# EAGLE board placa 1 (EAGLE 9.3.0)
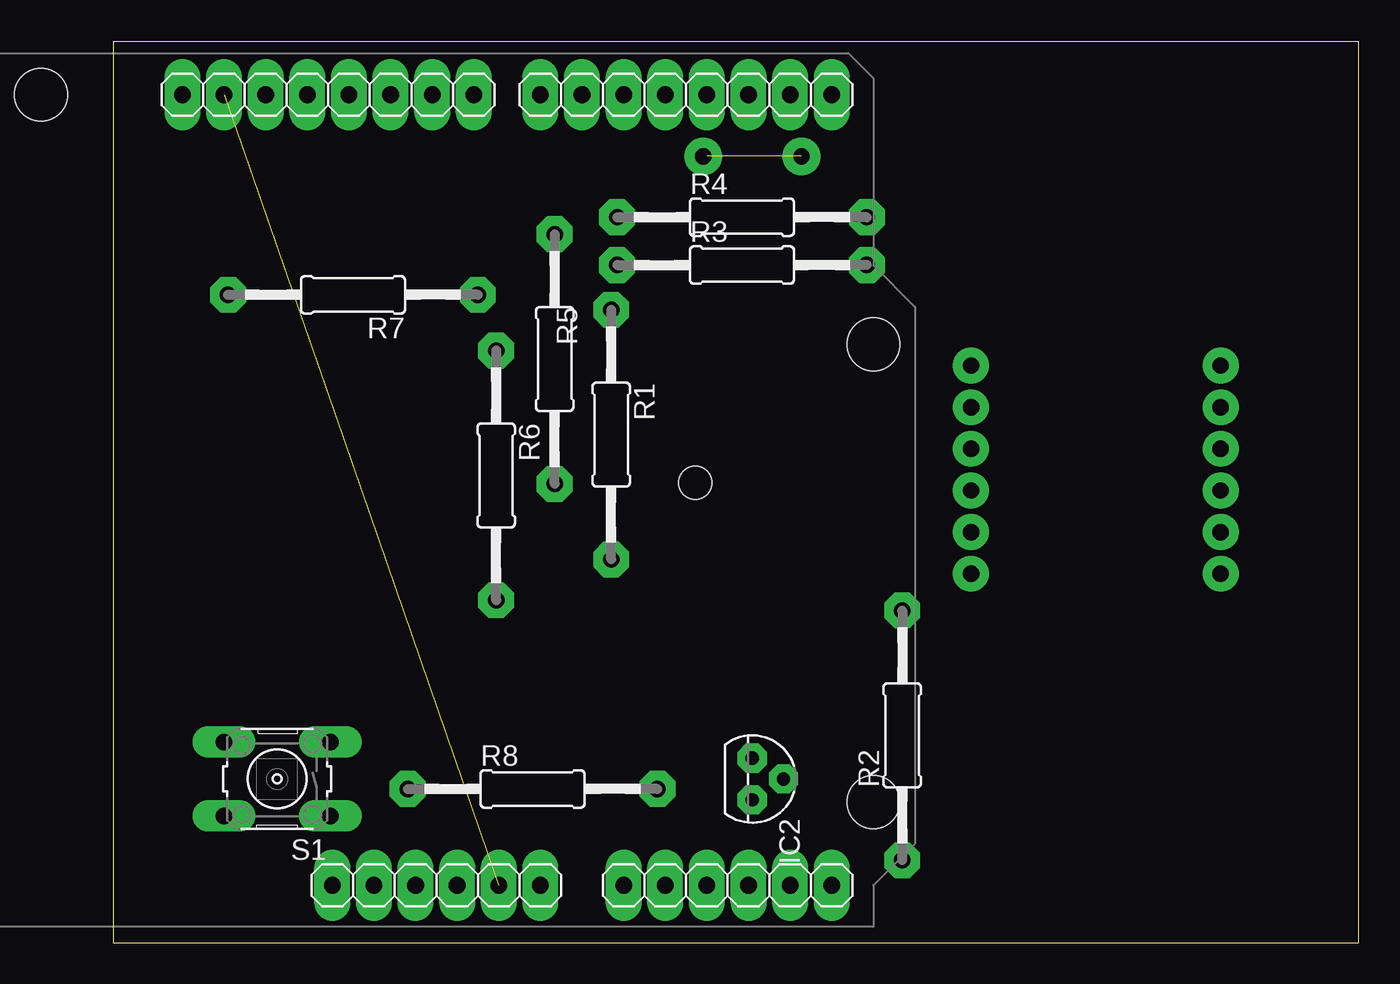
[diagram p0: board, top side]
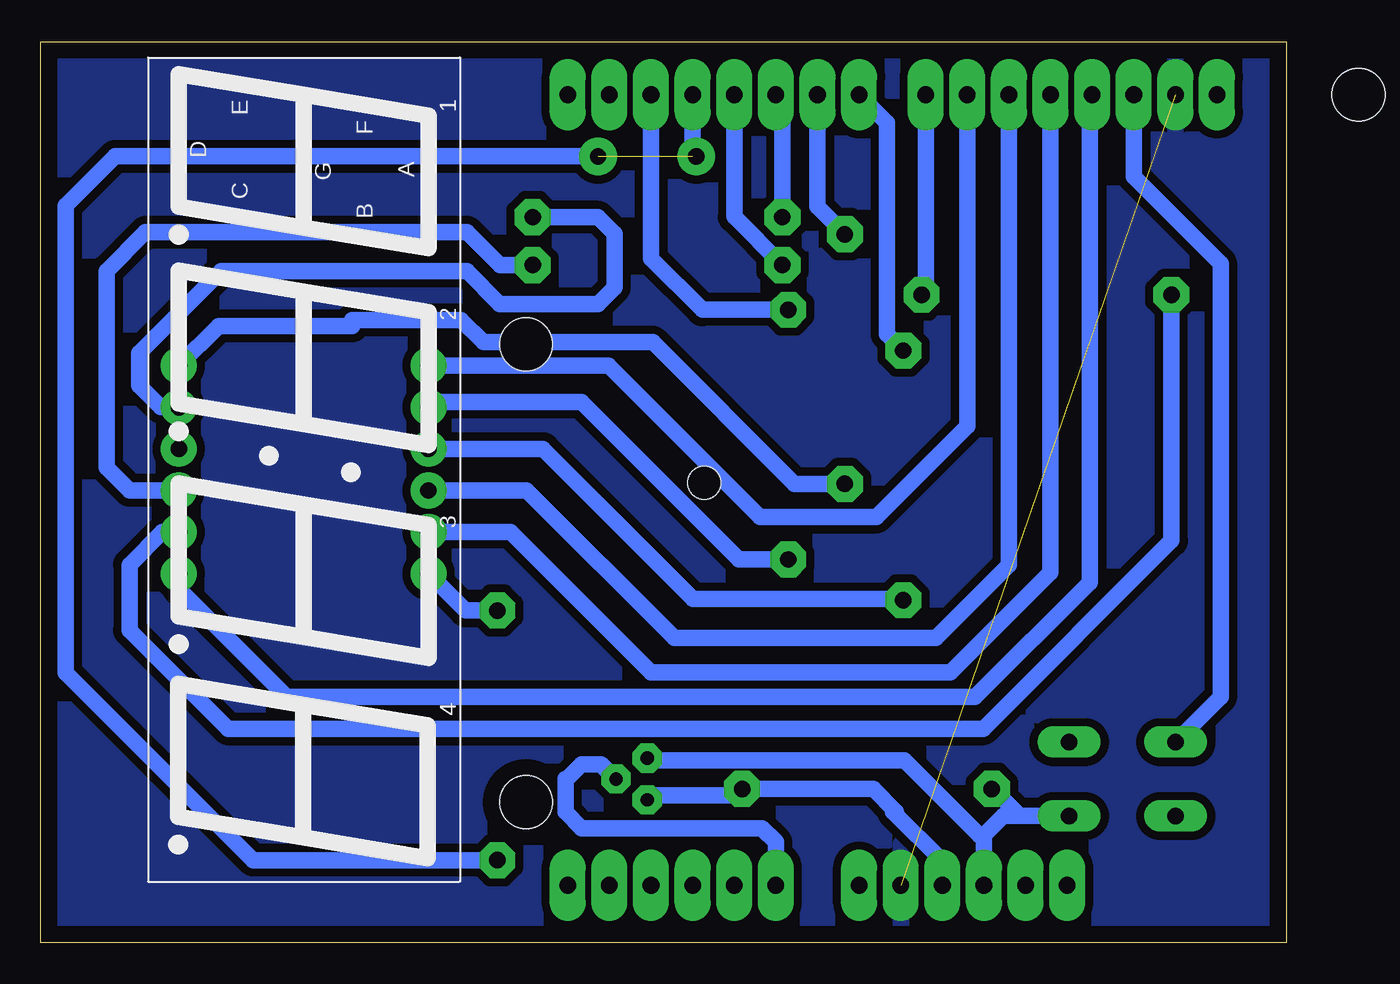
[diagram p1: board, bottom side, seen from below]

Size 76 x 55 mm. Coordinates in mm from the lower left corner, seen from the top.
Outline: 0,0 76,0 76,55 0,55 0,0
Copper layers (1*16): Top 0.035mm / dielectric 1.5mm / Bottom 0.035mm
Design rules "default": minimum track width 6mil, minimum drill 0.35mm, track to track 6mil, track to pad 6mil, pad to pad 6mil, via to via 6mil, smd to smd 6mil, copper to edge 40mil, drill to drill 6mil, minimum pad ring 10mil, minimum via ring 8mil, stop-mask expansion 4mil, vias tented up to drill 0mil, thermal gap 10mil

## Footprints (pad centres in the part's own frame; a part is rotated, then mirrored left to right if it is on the bottom)
ARDUINO2009_1 = drill 1.016 pad 2.184 long: 1 33.02,2.54; 2 35.56,2.54; 3 38.1,2.54; 4 40.64,2.54; 5 43.18,2.54; 6 45.72,2.54; 7 50.8,2.54; 8 53.34,2.54; 9 55.88,2.54; 10 58.42,2.54; 11 60.96,2.54; 12 63.5,2.54; 13 63.5,50.8; 14 60.96,50.8; 15 58.42,50.8; 16 55.88,50.8; 17 53.34,50.8; 18 50.8,50.8; 19 48.26,50.8; 20 45.72,50.8; 21 41.656,50.8; 22 39.116,50.8; 23 36.576,50.8; 24 34.036,50.8; 25 31.496,50.8; 26 28.956,50.8; 27 26.416,50.8; 28 23.876,50.8 | hole 3.2: 15.24,50.8; 66.04,35.56; 66.04,7.62 | hole 2: 55.17,27.114
TO92 = drill 0.813 pad 1.778 octagon: 1 -1.27,0; 2 0,1.905; 3 1.27,0
0207/15 = drill 1 pad 2.184 octagon: 1 -7.62,0; 2 7.62,0
B3F-10XX = drill 1 pad 1.93 long: 1 -3.251,2.261; 2 3.251,2.261; 3 -3.251,-2.261; 4 3.251,-2.261
DISPLAY = drill 1 pad 2.184: P$A 29.46,17.12; P$B 19.3,17.12; P$C 24.38,1.88; P$D 29.46,1.88; P$D1 32,17.12; P$D2 24.38,17.12; P$D3 21.84,17.12; P$D4 19.3,1.88; P$DOTS 26.92,1.88; P$E 32,1.88; P$F 26.92,17.12; P$G 21.84,1.88

## Placement (x,y rotation side)
IC1  [ARDUINO2009_1]  -19.65,0.97 0 top
IC2  LM35CZ  [TO92]  39,10 270 top
R1  [0207/15]  30.39,31.02 270 top
R2  [0207/15]  48.15,12.66 90 top
R3  [0207/15]  38.37,41.37 0 top
R4  [0207/15]  38.37,44.29 0 top
R5  [0207/15]  26.94,35.63 270 top
R6  [0207/15]  23.37,28.53 270 top
R7  [0207/15]  14.63,39.55 180 top
R8  [0207/15]  25.59,9.39 0 top
S1  [B3F-10XX]  10,10 180 top
U$1  NFD-5642BX  [DISPLAY]  69.47,3.23 90 top

## Library data of the parts
IC1 = arduino
IC2 = lm35
R1-R8 = rcl; SPICEPREFIX: R
S1 = switch-omron; MPN: B3F-1000; OC_FARNELL: 176432; OC_NEWARK: 36M3542
U$1 = NFD-5642Xx

## Nets
+3V3: IC1.2
GND: IC1.5 IC1.27
N$1: IC1.21 R7.1
N$2: IC1.20 R6.1
N$3: IC1.19 R5.1
N$4: IC1.18 R4.1
N$5: IC1.17 R3.1
N$6: IC1.16 R2.1
N$7: IC1.15 R1.1
N$8: R1.2 U$1.P$A
N$9: R2.2 U$1.P$B
N$10: R3.2 U$1.P$C
N$11: R4.2 U$1.P$D
N$12: R5.2 U$1.P$E
N$13: R6.2 U$1.P$F
N$14: R7.2 U$1.P$G
N$15: IC1.22 U$1.P$D1
N$16: IC1.23 U$1.P$D2
N$17: IC1.24 U$1.P$D3
N$18: IC1.25 U$1.P$D4
N$19: IC1.3 IC2.1 R8.1 S1.1
N$20: IC1.26 S1.4
N$21: IC1.4 IC2.3 R8.2
N$22: IC1.7 IC2.2

## Tracks (layer width: path | path; a pad name or v marks a point on that pad's centre or on a via)
GND  (1 unrouted)
  pour Bottom (isolate 100): -20.9,55 -20.9,0 46,0 46,2 50,6 50,38 arc1 46,42 46,55
  pour Bottom (isolate 0.5): 0,55 0,0 77,0 77,55
N$1
  Bottom 1.016: R7.1 22.01,39.79 IC1.21
N$2
  Bottom 1.016: R6.1 24.37,37.15 24.37,50.07 IC1.20
N$3
  Bottom 1.016: IC1.19 28.61,44.92 R5.1 26.61,43.58
N$4
  Bottom 1.016: R4.1 30.75,51.37 IC1.18
N$5
  Bottom 1.016: IC1.17 33.69,44.31 R3.1
N$6  (via drill 1 pad 2.3)  (1 unrouted)
  Bottom 1.016: R2.1 63.04,5.04 74.48,16.48 74.48,45 71.48,48 v42,48 | IC1.16 36.23,48 36,48
N$7
  Bottom 1.016: IC1.15 38.77,41.77 35.64,38.64 R1.1
N$8
  Bottom 1.016: R1.2 33.4,23.4 43,33 52.04,33 U$1.P$A
N$9
  Bottom 1.016: R2.2 50.1,20.28 U$1.P$B
N$10
  Bottom 1.016: U$1.P$C 70.59,27.61 72,29.02 72,41 69.63,43.37 49.99,43.37 47.99,41.37 R3.2
N$11
  Bottom 1.016: R4.2 42,44.29 41,43.29 41,40 42,39 48,39 50,41 65,41 70,36 70,34 68.69,32.69 U$1.P$D
N$12
  Bottom 1.016: R5.2 30.01,28.01 38.65,36.65 49,36.65 50.35,38 57,38 57,37.65 65.17,37.65 U$1.P$E
N$13
  Bottom 1.016: U$1.P$F 45.35,30.15 36.2,21 23.46,21 R6.2
N$14
  Bottom 1.016: U$1.P$G 68.59,25.07 70.59,23.07 70.59,19.07 64.59,13.07 18.49,13.07 7.01,24.55 R7.2
N$15
  Bottom 1.016: IC1.22 19.47,31.53 25,26 32.12,26 41.35,35.23 U$1.P$D1
N$16
  Bottom 1.016: IC1.23 16.93,23.07 21.39,18.61 37.35,18.61 46.35,27.61 U$1.P$D2
N$17
  Bottom 1.016: IC1.24 14.39,22.61 20.5,16.5 38.78,16.5 47.35,25.07 U$1.P$D3
N$18
  Bottom 1.016: IC1.25 12,51.62 12,22 19,15 61,15 67.59,21.59 U$1.P$D4
N$19
  Bottom 1.016: R8.1 17.9,9.39 16.25,7.74 | S1.1 16.25,7.74 | 16.25,7.74 17.26,7.74 18.45,6.55 | 18.45,6.55 IC1.3 | IC2.1 38.87,11.14 23.31,11.14 18.72,6.55 18.45,6.55
N$20
  Bottom 1.016: IC1.26 9.31,46.77 4,41.46 4,15 7,12 7.01,12 S1.4
N$21
  Bottom 1.016: IC1.4 20.99,4.99 24,8 23.82,8 25.21,9.39 R8.2 33.6,9 38.73,9 IC2.3
N$22
  Bottom 1.016: IC1.7 31.15,6.15 32,7 43,7 44,8 44,10 43.9,10 43,10.9 41.81,10.9 IC2.2
N$23  (via drill 1 pad 2.3)
  other vias: 36,48